# Altium PCB USB_C.PcbDoc
Units mm, origin at the board's own origin, x right, y up, seen from the top; angles counter-clockwise.
Board outline 47.3 x 26.41 mm, 2 copper layers (Top Layer, Bottom Layer); 32 components, 38 nets, 193 pads, 155 vias.
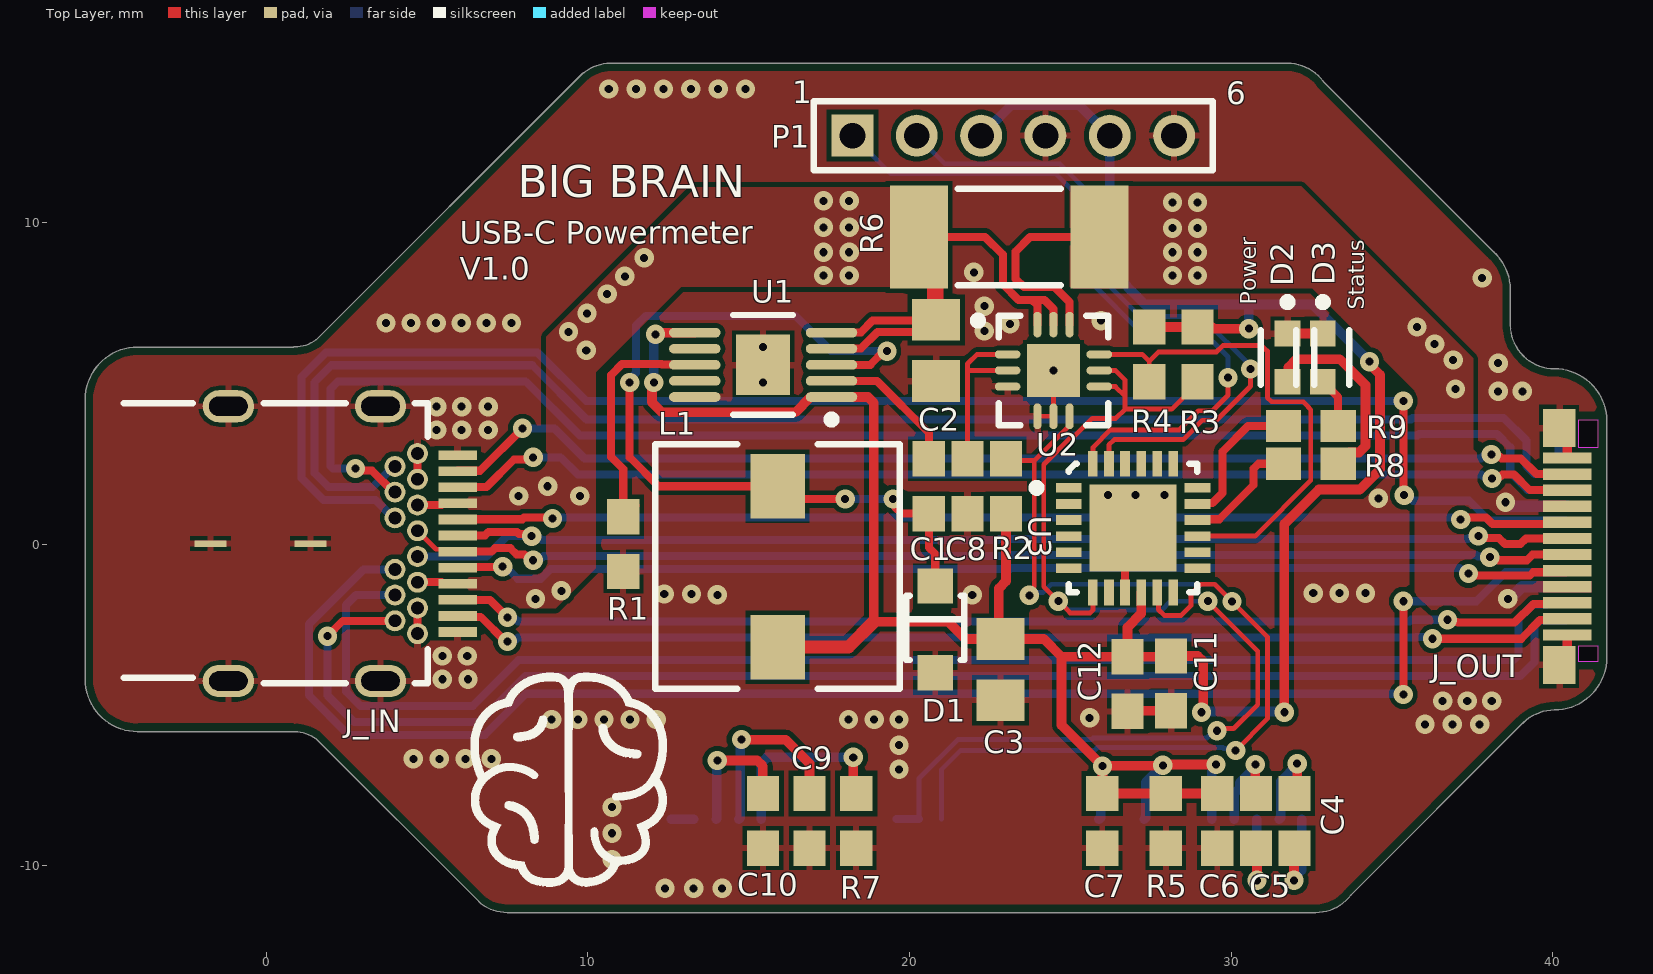
[diagram p0: Top Layer view]
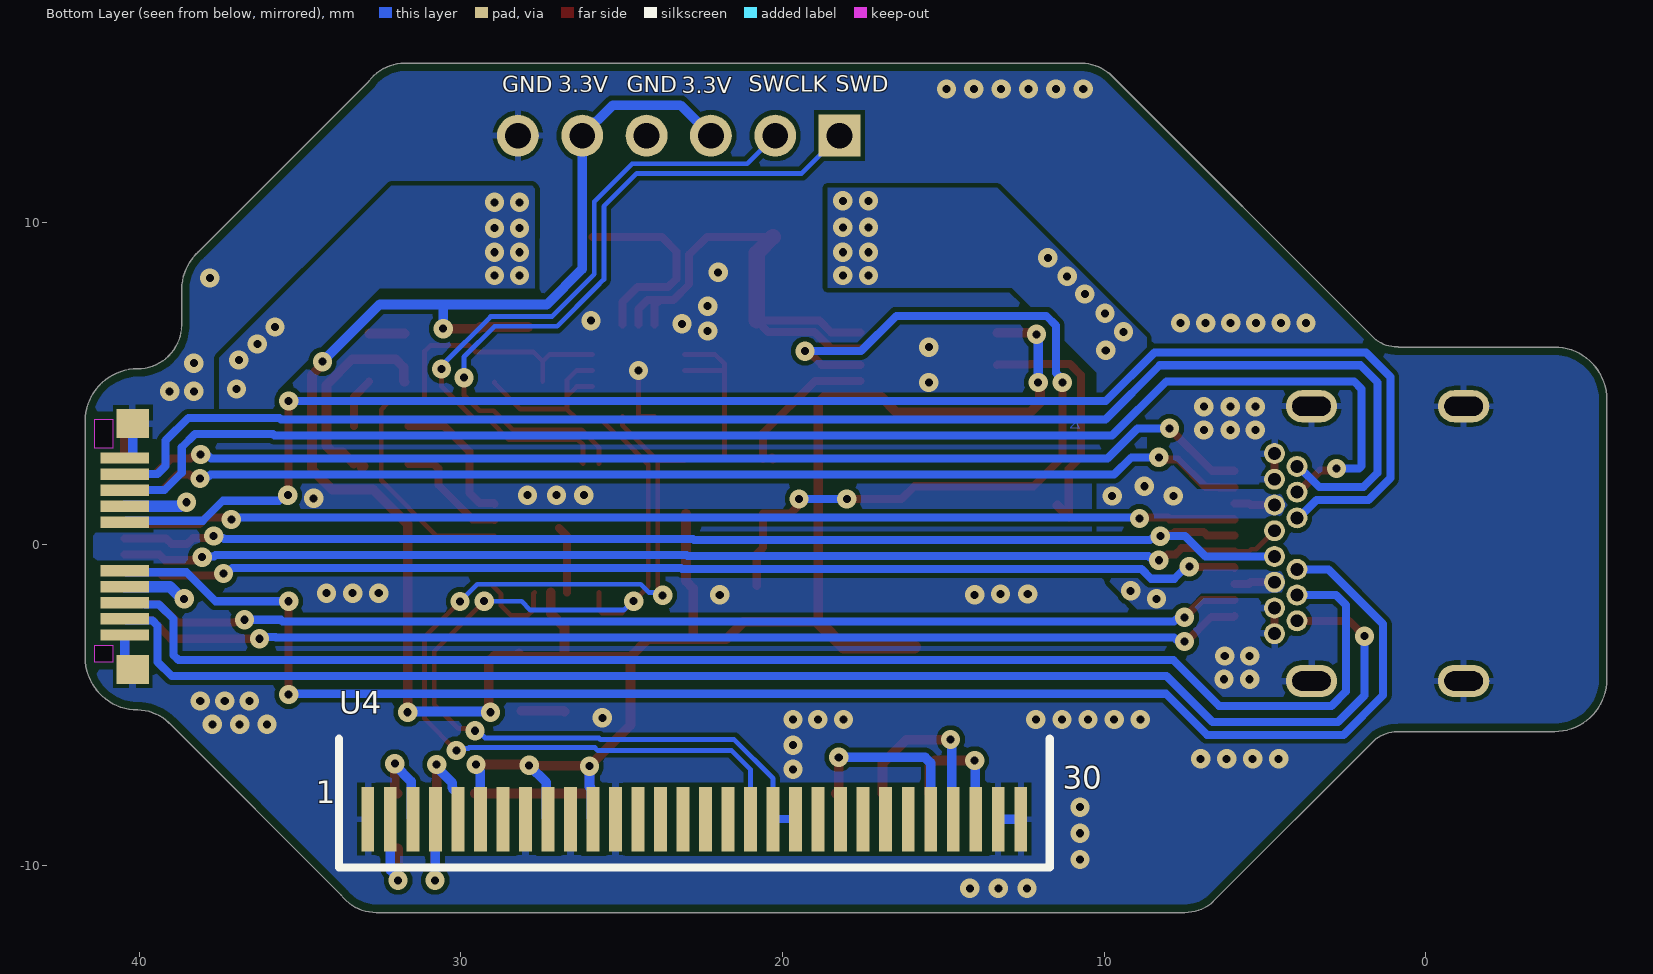
[diagram p1: Bottom Layer view, seen from below]
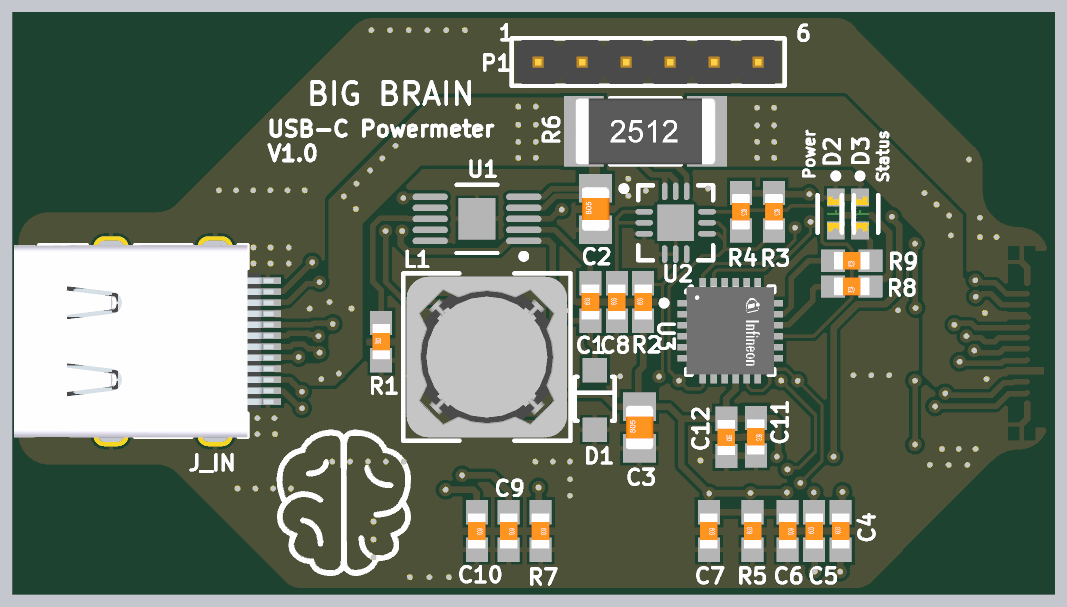
[diagram p2: 3D render of the assembled board from above, using the file's embedded part models]

## Layer stack, top to bottom
Top Solder: solder mask 0.0102, Solder Resist, Dk 3.5
Top Layer: signal copper 0.0356
Dielectric 1: dielectric 0.32, FR-4, Dk 4.8
Bottom Layer: signal copper 0.0356
Bottom Solder: solder mask 0.0102, Solder Resist, Dk 3.5

## Board outline
0.884,-5.832 cw(c0.884,-6.955) 1.55,-6.051 6.612,-11.113 ccw(c6.702,-11.023) 6.636,-11.132 ccw(c6.75,-11.075) 6.674,-11.177 ccw(c7.5,-10.075) 7.5,-11.452 ccw(c7.5,-11.325) 7.509,-11.452 ccw(c7.525,-11.325) 7.525,-11.453 32.6,-11.453 ccw(c32.6,-11.325) 32.612,-11.452 ccw(c32.625,-11.325) 32.624,-11.453 ccw(c32.624,-10.075) 33.722,-10.908 ccw(c33.638,-10.813) 33.728,-10.902 39.036,-5.583 ccw(c38.989,-5.464) 39.079,-5.554 cw(c40.05,-6.525) 40.049,-5.152 cw(c40.05,-5.496) 40.05,-5.152 ccw(c40.05,-3.525) 41.677,-3.525 41.677,3.825 ccw(c40.05,3.825) 40.05,5.452 ccw(c40.05,5.325) 40.049,5.452 cw(c40.05,6.825) 38.677,6.825 ccw(c38.67,6.825) 38.677,6.825 38.68,7.905 ccw(c38.648,7.905) 38.68,7.905 ccw(c38.553,7.905) 38.677,7.932 ccw(c37.05,7.9) 38.163,9.087 ccw(c38.076,8.995) 38.139,9.105 32.866,14.378 ccw(c32.75,14.325) 32.852,14.401 ccw(c31.75,13.575) 31.75,14.952 ccw(c31.75,14.827) 31.741,14.952 ccw(c31.725,14.826) 31.725,14.953 10.708,14.953 ccw(c10.708,14.826) 10.692,14.952 ccw(c10.725,13.575) 9.899,14.677 ccw(c9.975,14.575) 9.878,14.657 ccw(c9.915,14.535) 9.824,14.626 1.55,6.351 cw(c0.884,7.255) 0.884,6.132 ccw(c0.884,6.005) 0.849,6.127 -4,6.127 ccw(c-4,4.5) -5.627,4.5 -5.627,-4.2 ccw(c-4,-4.2) -4,-5.827 0.849,-5.827 ccw(c0.884,-5.705)

## Design rules (kind name [scope] priority, off if disabled: settings)
BoardOutlineClearance [All] p1: gap=0.25 ignorepadtopadclearanceinfootprint=FALSE except(0: Arc-SplitContinuation Track-SplitContinuation SMDPad-SplitContinuation THPad-SplitContinuation Via-SplitContinuation Fill-SplitContinuation Poly-SplitContinuation Region-SplitContinuation Text-SplitContinuation)
Clearance "Schematic Clearance Constraint" [InNet('No Net')] p1: gap=0.254 ignorepadtopadclearanceinfootprint=TRUE except(0: Arc-Hole Track-Hole SMDPad-Hole THPad-Hole Via-Hole Fill-Hole Poly-Hole Region-Hole Text-Hole; 0.127: Arc-Arc Arc-Track Track-Track; 0.6: Arc-Fill Arc-Poly Arc-Region Track-Fill Track-Poly Track-Region Fill-Fill Fill-Poly Fill-Region Poly-Poly Poly-Region Region-Region)
Clearance Clearance-xPP-xTP-xTT [All] p2: gap=0.15 ignorepadtopadclearanceinfootprint=TRUE
ComponentClearance [All] p1: gap=0.25 collisioncheckmode=3 verticalgap=0.25 showdistances=FALSE
DiffPairsRouting [All] p1: maxlimit=0.25 minlimit=0.15 mostfreqgap=0.25 toplayer_minwidth=0.15 toplayer_maxwidth=0.381 toplayer_prefwidth=0.381 bottomlayer_minwidth=0.15 bottomlayer_maxwidth=0.381 bottomlayer_prefwidth=0.381 maxuncoupledlength=12.5
Height [All] p1: minheight=0 maxheight=25 prefheight=12.5
HoleSize HoleSize-PTH [All] p1: absolutevalues=TRUE maxlimit=2 minlimit=0.25 maxpercent=80.000 minpercent=20.000
HoleToHoleClearance [All] p1: gap=0.35 allowstackedmicrovias=TRUE
MatchedLengths "Schematic Matched Net Lengths" [InNetClass('LenghtMatching')] p1: tolerance=0.01 checknetsindiffpair=FALSE checkdiffpairvsdiffpair=TRUE checkxsignals=TRUE checkothers=TRUE
MinimumAnnularRing "Minimum IAR  >0.45mm" [((ObjectKind = 'Pad') OR (ObjectKind = 'Via')) And (Layer = 'MultiLayer') And (HoleDiameter > AsMM(0.45))] p1: minimumring=0.175 // minimum inner annular ring for pads > 0.45mm finished hole size
MinimumAnnularRing "Minimum IAR <=0.45mm" [((ObjectKind = 'Pad') OR (ObjectKind = 'Via')) And (Layer = 'MultiLayer') And (HoleDiameter <= AsMM(0.45))] p2: minimumring=0.175 // minimum inner annular ring for pads <= 0.45mm finished hole size
MinimumSolderMaskSliver [All] p1: minsoldermaskwidth=0.08
PolygonConnect [InNet('GND') vs InNet('GND')] p1: thpad.connectstyle=Relief thpad.reliefconductorwidth=0.2 thpad.reliefentries=4 thpad.polygonreliefangle="90 Angle" thpad.airgapwidth=0.127 smdpad.connectstyle=Relief smdpad.reliefconductorwidth=0.2 smdpad.reliefentries=4 smdpad.polygonreliefangle="90 Angle" smdpad.airgapwidth=0.127 via.connectstyle=Direct via.reliefconductorwidth=0.2 via.reliefentries=4 via.polygonreliefangle="90 Angle" via.airgapwidth=0.127
PolygonConnect PolygonConnect-xTW [InNetClass('HV')] p2: connectstyle=Direct reliefconductorwidth=0.2 reliefentries=4 polygonreliefangle="90 Angle" airgapwidth=0.2
RoutingCorners [All] p1: cornerstyle=45-Degree minsetback=2.5 maxsetback=2.5
RoutingVias "RoutingVias <= 0.45mm" [All] p1: holewidth=0.25 width=0.6 viastyle="Through Hole" minholewidth=0.25 minwidth=0.6 maxholewidth=0.45 maxwidth=0.8 // finishet hole size <= 0.45mm
SilkToSilkClearance [All] p1: silktosilkclearance=0.2
SilkToSolderMaskClearance SilkscreenOverComponentPads [IsPad] p1: minsilkscreentomaskgap=0.2 clearancetoexposedcopper=TRUE
SolderMaskExpansion [All] p1: expansion=0 istentingtop=FALSE
UnRoutedNet [All] p1: checkbadconnections=TRUE
Width Width-xTW [All] p1: maxlimit=1.5 minlimit=0.15 preferedwidth=0.2
20 further rules are at their usual default settings.

## Classes and differential pairs
net class LenghtMatching: D1_N D1_P SSRX1_N SSRX1_P SSRX2_N SSRX2_P SSTX1_N SSTX1_P SSTX2_N SSTX2_P
net class HV: VBUS_IN VBUS_OUT
differential pair SSTX2: +SSTX2_P -SSTX2_N
differential pair SSTX1: +SSTX1_P -SSTX1_N
differential pair SSRX2: +SSRX2_P -SSRX2_N
differential pair SSRX1: +SSRX1_P -SSRX1_N
differential pair D1: +D1_P -D1_N

## Components (designator, comment, footprint, x,y, rotation, side; value= is the part's Value field where it differs from the comment)
C1 "0.47uF" _0603 20.6,1.8 r90 top
C2 "4,7u" _0805 20.825,6.025 r90 top
C3 "885012107006" _0805 22.825,-3.9 r90 top
C4 "2.2u" _0603 31.966,-8.601 r90 top
C5 "2.2u" _0603 30.766,-8.601 r90 top
C6 "0.1u" _0603 29.566,-8.601 r270 top
C7 "10u" _0603 25.991,-8.601 r270 top
C8 "22pF" _0603 21.8,1.8 r90 top
C9 "10u" _0603 16.891,-8.601 r270 top
C10 "10u" _0603 15.441,-8.601 r270 top
C11 "100n" _0603 28.125,-4.325 r270 top
C12 "100n" _0603 26.775,-4.35 r270 top
D1 "NTS260SFT1G" SOD_123 20.8,-2.6 r270 top
D2 "LT Q39G-Q1OO-25-1" FP-LT_Q39G-MFG 31.75,5.8 r270 top
D3 "LT Q39G-Q1OO-25-1" FP-LT_Q39G-MFG 32.85,5.8 r270 top
J_IN "632723100011" 632723100011 0.024,0.017 r270 top
J_OUT "632712000011" 632712000011 47.25,-0.073 r90 top
L1 "7447779112" WE-PD-M-PB 15.9,-0.7 r270 top
P1 "62000611121" 62000611121 23.225,12.7 r0 top
R1 "118k" _0603 11.1,0 r90 top
R2 "2k" _0603 23,1.8 r90 top
R3 "2k" _0603 28.95,5.9 r270 top
R4 "2k" _0603 27.45,5.9 r270 top
R5 "10k" _0603 27.966,-8.601 r90 top
R6 "20m" _2512 23.1,9.55 r0 top
R7 "390k" _0603 18.341,-8.601 r270 top
R8 "680" _0603 32.475,2.5 r180 top
R9 "680" _0603 32.475,3.675 r180 top
U1 "LT3991EMSE-3.3#TRPBF" LT-MSE-10-EDP_N 15.45,5.575 r180 top
U2 "LTC2945IUD-1#PBF" LT-UD-12_L 24.475,5.4 r0 top
U3 "XMC1100-T016F0064 AA" QFN50P400X400X90-25N 26.95,0.5 r0 top
U4 "SSD1306_OLED" SSD1306 32.891,-8.551 r180 bottom

## Footprints (in the part's own frame and the unit in brackets; to place one, negate y for a bottom-side part, rotate by r counter-clockwise, add the part's x,y. Pads: shape width x height; smd on the part's side, far side on the other; paste and mask are expansions set on the pad)
62000611121 [mm] "Pin Header, pitch 2.00 mm, THT, Vertical, single row, 6p"
  rect 1.3x1.3 hole 0.8: 1(-5,0)
  round 1.3 hole 0.8: 2(-3,0) 3(-1,0) 4(1,0) 5(3,0) 6(5,0)
  silkscreen extent -6.2,-1.07 6.2,1.07, body extent -6,-1 6,1, height 6.05
632712000011 [mm] "USB 3.1 Type C Plug Horizontal SMT"
  rect 0.35x1.5 smd: A1(2.75,6.8) A2(2.25,6.8) A3(1.75,6.8) A4(1.25,6.8) A5(0.75,6.8) A6(0.25,6.8) A7(-0.25,6.8) A8(-0.75,6.8) A9(-1.25,6.8) A10(-1.75,6.8) A11(-2.25,6.8) A12(-2.75,6.8)
  rect 0.35x1.5 smd far side: B1(-2.75,6.8) B2(-2.25,6.8) B3(-1.75,6.8) B4(-1.25,6.8) B5(-0.75,6.8) B8(0.75,6.8) B9(1.25,6.8) B10(1.75,6.8) B11(2.25,6.8) B12(2.75,6.8)
  rect 0.9x1 smd far side: Shell(-3.825,7.05) Shell(3.825,7.05)
  rect 1.18x1 smd: Shell(-3.69,7.05) Shell(3.69,7.05)
  Keep-Out Layer board cut-out: -3.58,5.85 -3.58,6.45 -3.08,6.45 -3.08,5.85
  Keep-Out Layer board cut-out: 3.075,5.85 3.075,6.45 3.945,6.45 3.945,5.85
  body extent -5.13,-5.92 5.12,7.48, height 1.74
632723100011 [mm] "USB 3.1 Type C Receptacle Horizontal THR"
  rect 0.3x1.2 smd: A1(-2.75,5.93) A2(-2.25,5.93) A3(-1.75,5.93) A4(-1.25,5.93) A5(-0.75,5.93) A6(-0.25,5.93) A7(0.25,5.93) A8(0.75,5.93) A9(1.25,5.93) A10(1.75,5.93) A11(2.25,5.93) A12(2.75,5.93)
  round 0.65 hole 0.4: B1(2.8,4.68) B2(2.4,3.98) B3(1.6,3.98) B4(1.2,4.68) B5(0.8,3.98) B6(0.4,4.68) B7(-0.4,4.68) B8(-0.8,3.98) B9(-1.2,4.68) B10(-1.6,3.98) B11(-2.4,3.98) B12(-2.8,4.68) G1(2,4.68) G2(-2,4.68)
  oval 1x1.6 hole 0.6 slot 1.2 at 90 deg: Shell(-4.27,3.53) Shell(-4.27,-1.2) Shell(4.27,3.53) Shell(4.27,-1.2)
  rect 0.2x1 smd: Shell(0,1.35) Shell(0,-1.75)
  silkscreen extent -4.37,-4.45 4.34,5, body extent -4.37,-5.6 4.37,6.19, height 3.05
_0603 [mm]
  rect 1.1x1 smd: 1(-0.85,0) 2(0.85,0)
  body extent -0.8,-0.41 0.8,0.39, height 0.3
_0805 [mm]
  rect 1.3x1.5 smd: 1(-0.95,0) 2(0.95,0)
  body extent -1,-0.64 1,0.62, height 0.78
_2512 [mm]
  rect 1.8x3.2 smd: 1(-2.8,0) 2(2.8,0)
  silkscreen extent -1.6,-1.5 1.6,1.5, body extent -3.17,-1.5 3.17,1.5, height 1.6
FP-LT_Q39G-MFG [mm]
  rect 0.8x0.8 smd paste+0 mask+0: 1(-0.75,0) 2(0.75,0)
  silkscreen extent -1.85,-0.82 0.85,0.82, body extent -1.25,-0.55 1.25,0.55, height 0.25
LT-MSE-10-EDP_N [mm] "SOP, 10-Leads, Body 3.1x3.1mm, Pitch 0.5mm, Thermal Pad 1.88x1.68mm, IPC Medium Density"
  oval 1.6x0.3 smd: 1(-2.125,1) 2(-2.125,0.5) 3(-2.125,0) 4(-2.125,-0.5) 5(-2.125,-1) 6(2.125,-1) 7(2.125,-0.5) 8(2.125,0) 9(2.125,0.5) 10(2.125,1)
  rect 1.68x1.88 smd: 11(0,0)
  silkscreen extent -2.25,-1.55 0.92,1.82, body extent -1.55,-1.55 1.55,1.55, height 1.1
LT-UD-12_L [mm] "QFN, 12-Leads, Body 3.1x3.1mm, Pitch 0.5mm, Thermal Pad 1.65x1.65mm, IPC High Density"
  oval 0.8x0.25 smd: 1(-1.425,0.5) 2(-1.425,0) 3(-1.425,-0.5) 7(1.425,-0.5) 8(1.425,0) 9(1.425,0.5)
  oval 0.25x0.8 smd: 4(-0.5,-1.425) 5(0,-1.425) 6(0.5,-1.425) 10(0.5,1.425) 11(0,1.425) 12(-0.5,1.425)
  rect 1.65x1.65 smd: 13(0,0)
  silkscreen extent -2.47,-1.7 1.7,1.7, body extent -1.55,-1.55 1.55,1.55, height 0.8
QFN50P400X400X90-25N [mm] "QFN,0.50mm pitch,square;24 pin,4.00mm L X 4.00mm W X 0.90mm H body (w/thermal tab)"
  rect 0.8x0.3 smd paste+0 mask+0: 1(-2,1.25) 2(-2,0.75) 3(-2,0.25) 4(-2,-0.25) 5(-2,-0.75) 6(-2,-1.25) 13(2,-1.25) 14(2,-0.75) 15(2,-0.25) 16(2,0.25) 17(2,0.75) 18(2,1.25)
  rect 0.3x0.8 smd paste+0 mask+0: 7(-1.25,-2) 8(-0.75,-2) 9(-0.25,-2) 10(0.25,-2) 11(0.75,-2) 12(1.25,-2) 19(1.25,2) 20(0.75,2) 21(0.25,2) 22(-0.25,2) 23(-0.75,2) 24(-1.25,2)
  rect 2.7x2.7 smd paste+0 mask+0: 25(0,0)
  silkscreen extent -3.12,-2 2,2, body extent -2,-2 2,2, height 0.91
SOD_123 [mm]
  rect 1.1x1.1 smd: 1(1.4,0) 2(-1.3,0)
  silkscreen extent -1,-0.9 1,0.9, body extent -1.09,-0.85 1.54,0.85, height 1.3
SSD1306 [mm]
  rect 0.4x2 smd: 1(0,0) 2(0.7,0) 3(1.4,0) 4(2.1,0) 5(2.8,0) 6(3.5,0) 7(4.2,0) 8(4.9,0) 9(5.6,0) 10(6.3,0) 11(7,0) 12(7.7,0) 13(8.4,0) 14(9.1,0) 15(9.8,0) 16(10.5,0) 17(11.2,0) 18(11.9,0) 19(12.6,0) 20(13.3,0) 21(14,0) 22(14.7,0) 23(15.4,0) 24(16.1,0) 25(16.8,0) 26(17.5,0) 27(18.2,0) 28(18.9,0) 29(19.6,0) 30(20.3,0)
  silkscreen extent -0.9,-1.5 21.2,2.5
WE-PD-M-PB [mm] "SMD Inductor, 2-Leads, Body 7.3 x 7.3 mm"
  rect 2x1.7 smd: 1(-2.5,0) 2(2.5,0)
  silkscreen extent -3.8,-3.8 3.8,3.8, body extent -3.65,-3.65 3.65,3.65, height 4.09

## Part data
C1 C4 C5 C6 C7 C8 C9 C10 C11 C12: library part Cap_129, ComponentLink1URL=#WERT!, mounting=SMD, Name=Cap_0603, QR=0, UID=Cap_129
C2: library part Cap_116, Capacity=1n0, Voltage=50V, ComponentLink1URL=#WERT!, mounting=SMD, Name=Cap_cer_1n0_50V, QR=0, UID=Cap_116
C3: library part Cap_111, Capacity=18p, Voltage=50V, ComponentLink1URL="javascript:Richfaces.showModalPanel('quickViewModalPanel', %7burl:'/web/p/products/723-6228',viewMode:'quickView'%7d);", mounting=SMD, Name=Cap_cer_18p_50V, Name_Hyperlink="Keramikkondensator SMT 18 pF 50 VDC", QR=0, RS_number=723-6228, UID=Cap_111
D1: library part DIODE_4, Current / Power="1.1 A", ComponentLink1URL=http://at.rs-online.com/web/search/searchBrowseAction.html?method=getProduct&R=2540702, mounting=THT, Name=11DQ06, Name_Hyperlink="Schottky-Diode 11DQ06", QR=1, RS_number=254-0702, Type=Schottky, UID=DIODE_4
D2 D3: library part CMP-62016-000026-1, "LED GREEN DIFFUSED 0603 SMD", Case/Package=SMD/SMT, Color=Green, Forward Current=15mA, Forward Voltage=3.2V, Max Operating Temperature=85°C, Min Operating Temperature=-40°C, Reverse Voltage=5V, Test Current=5mA, Depth=0.9mm, Dominant Wavelength=530nm, Length=1.7mm, Lens Style=Diffused, Luminous Flux=0.55lm, Luminous Intensity=280mcd, Mount="Surface Mount", Number of Elements=1, Number of LEDs=1, Number of Pins=2, Packaging="Tape and Reel", Radiation Hardening=No
J_IN: library part CMP-1502-03213-1, "USB 3.1 Type C Receptacle WR-COM, Horizontal, SMT / THT", Contact Resistance=30mOhm, Manufacturer="Wurth Elektronik", Operating Temperature=-40to105degC, Rated Current=5A, Working Voltage=20VDC, Connector Type=USB3.1TypeC, Datasheet URL=https://katalog.we-online.de/em/datasheet/632723x00011%282%29.pdf, Gender=Receptacle, Manufacturer URL=http://www.we-online.de, Mounting Technology=SMT/THT, Orientation=Horizontal, Package Reference=632723100011, Packaging=TapeandReel, Part Number=632723100011, Publisher=WurthElektronik
J_OUT: library part CMP-1502-03215-1, "USB 3.1 Type C Plug WR-COM, Horizontal, SMT", Contact Resistance=30mOhm, Manufacturer="Wurth Elektronik", Operating Temperature=-25to105degC, Rated Current=5A, Working Voltage=20VDC, Connector Type=USB3.1TypeC, Datasheet URL=https://katalog.we-online.de/em/datasheet/632712000011.pdf, Gender=Plug, Manufacturer URL=http://www.we-online.de, Mounting Technology=SMT, Orientation=Horizontal, Package Reference=632712000011, Packaging=TapeandReel, Part Number=632712000011, Publisher=WurthElektronik
L1: library part CMP-0227-00301-1, "SMD-Shielded Power Inductor WE-PD, L = 12.0 µH", Inductance="12.0 ÂµH", ComponentLink1Description="Manufacturer Link", ComponentLink1URL=http://www.we-online.com, ComponentLink2Description=Datasheet, ComponentLink2URL=http://www.we-online.de/katalog/media/pdf/7447779112.pdf, DatasheetVersion="ver 10, Jan-2008", PackageDescription="SMD Inductor, 2-Leads, Body 7.3 x 7.3 mm", PackageReference=WE-PD-M-PB, PackageVersion=2008
P1: library part CMP-1502-00960-1, "THT Vertical Pin Header WR-PHD, Pitch 2.00 mm, Single Row, 6 pins", Contact Resistance=20mOhm, Manufacturer="Wurth Elektronik", Operating Temperature=-40to105degC, Rated Current=2A, Withstanding Voltage=500VAC, Working Voltage=200VAC, Datasheet URL=https://katalog.we-online.de/em/datasheet/62000611121.pdf, Gender=Male, Manufacturer URL=http://www.we-online.de, Mounting Technology=THT, Orientation=Vertical, Package Reference=62000611121, Packaging=Bag, Part Number=62000611121, Pin Number=6, Pitch=2.00mm, Publisher=WurthElektronik, Row Number=Single
R1 R2 R3 R4 R5 R7 R8 R9: library part Res_5, ComponentLink1URL=#WERT!, mounting=SMD, Name=Res_0603, UID=Res_5
R6: library part Res_11, ComponentLink1URL=#WERT!, mounting=SMD, Name=Res_2512, UID=Res_11
U1: library part CMP-0491-01057-1, "1.2 A Step-Down Regulator with 2.8 uA Quiescent Current, 10-pin SOP (MSE-10-EDP), -40 to 125 degC, Pb-Free, Tape and Reel", Frequency Adjust Range="200kHz - 2MHz", Manufacturer="Linear Technology", ComponentLink1Description="Manufacturer URL", ComponentLink1URL=http://www.linear.com/, ComponentLink2Description=Datasheet, ComponentLink2URL=http://cds.linear.com/docs/en/datasheet/3991fa.pdf, ComponentLink3Description="Package Specification", ComponentLink3URL=http://cds.linear.com/docs/en/packaging/05081664_I_MSE.pdf, DatasheetVersion="Rev. A", Mounting Technology="Surface Mount", Number of Outputs=1, PackageDescription="10-Pin Plastic MSOP, Exposed Die Pad, Body 3 x 3 mm, Pitch 0.5 mm", PackageReference=MSE-10, PackageVersion="Rev. I, 05/2013", Packing="Tape and Reel", PartNumber=LT3991EMSE-3.3#TRPBF, RoHS=TRUE
U2: library part CMP-0482-01542-1, "Wide Range I2C Power Monitor, 12-pin QFN (UD-12), -40 to 85 degC, Pb-Free", Manufacturer="Linear Technology", Code_JEDEC=MO-220, ComponentLink1Description="Manufacturer URL", ComponentLink1URL=http://www.linear.com/, ComponentLink2Description=Datasheet, ComponentLink2URL=http://cds.linear.com/docs/en/datasheet/2945f.pdf, ComponentLink3Description="Package Specification", ComponentLink3URL=http://cds.linear.com/docs/en/packaging/QFN_12_%2005-08-1855.pdf, Mounting Technology="Surface Mount", Number of Supplies(#)=1, PackageDescription="12-Pin Plastic QFN, Body 3 x 3 mm, Pitch 0.5 mm", PackageReference=UD-12, PackageVersion="Rev. Ã˜, 06/2010", PartNumber=LTC2945IUD-1#PBF, RoHS=TRUE
U3: library part "XMC1100-Q024F0064 AA", "32-bit XMC1000 Industrial Microcontrollers ARM® Cortex™-M0 / PG-VQFN-24-19", I/O Operation Voltages="3.3 V, 5.0 V", Manufacturer=Infineon, Max Clock Frequency="32 MHz", On-chip Voltage Regulator=TRUE, PartNumber="XMC1100-Q024F 0064 AA", Power Modes="clock gating possible", Temperature range="-40 to 85°C", A / D input lines=8, CAN Nodes=0, Comment/Add. Features="Temp. Sensor", ComponentLink2Description=Datasheet, ComponentLink2URL=http://www.infineon.com/dgdl/xmc1100_ds_v1.4_2014_05.pdf?folderId=db3a30433580b3710135a47f3eb76c98&fileId=db3a30433d1d0bbe013d256b60160b7f&ack=t, ComponentLink3Description="Package Specification", ComponentLink3URL=http://www.infineon.com/cms/en/product/microcontroller/32-bit-industrial-microcontroller-based-on-arm-registered-cortex-tm-m/32-bit-xmc1000-industrial-microcontroller-arm-registered-cortex-tm-m0/channel.html?channel=db3a30433c1a8752013c1aa35a6a0029&tab=2, DatasheetVersion="Rev. 1.4", Digital I/O Lines=22, DMA Channels=0, DSP functionality (e.g MDU/MAC)=FALSE, E2PROM Emulation (Data-Flash)=TRUE, External Bus interface=FALSE, FlexRay<sup>TM</sup>=FALSE, Floating Point Unit=FALSE, Green=TRUE, Halogen-free=TRUE, Instruction set architecture="ARM Cortex-M0", Instruction width [bits]=32/16, LIN BSL loader (for fast Flash programming)=FALSE, Mounting Technology="Surface Mount", Number of ADC Modules=1, On-chip clock generation=TRUE, Oscillator Watchdog=TRUE, PackageDescription="24-Pin Plastic (Green) Plastic (Green) Very Thin Profile Quad Flat Non Leaded Package, Body 4.0 x 4.0 mm, Pitch 0.5 mm", PackageReference=PG-VQFN-24-13, PackageVersion="V1.4, 05/2014", Peripheral Control Processor (PCP)=FALSE, Program Memory="64.0 KByte", Real Time Clock (RTC)=TRUE, Serial I/O Interfaces=2, SRAM (incl. Cache)="64.0 KByte", Timed I/O Pins (PWM-Ch,CAPCOM)=22, Timer / Counter=4, Touch / LED Matrix control=FALSE, Type of Memory=Flash, Type of Serial I/O Interfaces="SPI(2), Dual SPI, Quad SPI, UART, I2C, I2S", Watchdog Timer=TRUE

## Via types
v1: diameter 0.6, hole 0.25, Top Layer to Bottom Layer, tented both sides, 154 vias
v2: diameter 0.6/0.6 (per signal layer), hole 0.25, Top Layer to Bottom Layer, tented both sides, 1 vias

## Nets (pads, with @x,y where several pads share a name; then routed paths per layer and width w, separated by ;. In a path a pad name is that pad's centre, name@x,y a point inside that pad or via, vN(x,y) a via of type N, cw(c..) or ccw(c..) an arc to the next point about the centre after c; other vN are vias at no path point)
+3.3V: C3.2 C6.1 C7.1 C11.1 C12.1 L1.2 P1.3 P1.5 R2.1 R3.1 R4.1 R5.2 U1.1 U1.6 U3.10 U4.6 U4.9 U4.11 | length 93.8
  Top Layer w0.3: v1(12.05,5.025) 11.993,4.968 11.993,4.407 12.3,4.1 16.45,4.1 16.925,4.575 U1.1 18.709,4.575 18.885,4.399 18.885,-2.415 21.209,-2.415 21.744,-2.95 C3.2 ; v1(12.1,6.525) 12.15,6.575 U1.6 ; R2.1 23,-1.15 22.775,-1.375 22.775,-2.9 C3.2 ; U3.10 27.2,-2.162 26.775,-2.587 C12.1 ; v1@27.818,-6.818 v1(27.875,-6.875) 27.863,-6.887 26.013,-6.887 v1(26,-6.9) ; R4.1@27.9,6.75 29.4,6.75 29.45,6.7 v1(30.55,6.7) ; v1@27.931,-6.85 v1(29.525,-6.85) ; C11.1@28.1,-3.5 C12.1 ; C11.1@28.2,-3.4 C11.1 28.957,-3.475 29.132,-3.651 29.132,-5.168 v1(29.075,-5.225) ; C6.1 R5.2 C7.1 26,-7.742 v1(26,-6.9) ; v1(31.65,-5.225) 31.65,0.626 32.724,1.7 33.999,1.7 34.625,2.326 34.625,5.267 34.299,5.593 v1(34.299,5.674) ; C3.2 24.175,-2.95 24.725,-3.5 24.788,-3.5 ; 24.788,-3.5 C12.1 ; 24.788,-3.5 24.725,-3.562 24.725,-5.625 v1(26,-6.9)
  Top Layer w0.4: L1.2 18.1,-3.2 18.885,-2.415
  Bottom Layer w0.3: v1(12.05,5.025) 12.05,6.475 v1(12.1,6.525) ; P1.3 23.175,13.65 25.275,13.65 P1.5 26.225,8.55 27.325,7.45 30.55,7.45 ; U4.11 25.941,-8.501 25.941,-7.601 26,-7.542 v1(26,-6.9) v1@26.057,-6.843 ; U4.9 27.341,-8.501 27.341,-7.409 v1(27.875,-6.875) ; v1(29.075,-5.225) 29.1,-5.2 31.625,-5.2 v1(31.65,-5.225) ; U4.6 v1@29.391,-7.065 ; v1(30.55,6.7) 30.55,7.45 ; v1(34.299,5.674) 32.523,7.45 30.55,7.45
ALERT: R4.2 U2.9 U3.15 | length 15.6
  Top Layer w0.15: U2.9 27.231,5.9 27.45,5.681 ; R4.2 27.45,5.681 ; U3.15 30.743,0.25 32.475,1.982 32.475,4.175 32.4,4.25 32.4,4.268 32.243,4.425 31.257,4.425 31.125,4.557 31.125,6 30.95,6.175 29.743,6.175 29.543,5.975 27.744,5.975 27.45,5.681
CC1: J_IN.A5 J_OUT.A5 | length 34.7
  Top Layer w0.25: J_IN.A5 5.961,0.775 7.963,0.775 8.014,0.825 8.875,0.825 v1(8.9,0.8) ; v1(37.134,0.766) 37.197,0.828 37.92,0.828 38.121,0.627 40.4,0.627 J_OUT.A5
  Bottom Layer w0.25: v1(8.9,0.8) 8.928,0.828 37.072,0.828 v1(37.134,0.766)
CC2: J_IN.B5 J_OUT.B5 | length 49.1
  Top Layer w0.25: v1(35.35,-4.675) v1(35.35,-1.775)
  Bottom Layer w0.25: J_IN.B5 3.027,-0.783 1.329,-2.481 1.329,-4.696 2.56,-5.928 6.795,-5.928 8.073,-4.65 35.325,-4.65 v1(35.35,-4.675) ; v1(35.35,-1.775) 37.625,-1.775 38.527,-0.873 40.4,-0.873 J_OUT.B5
D1_N: J_IN.A7 J_IN.B7 J_OUT.A7 | length 36.4
  Top Layer w0.15: J_IN.B7 5.279,-0.158 5.429,-0.158 5.504,-0.233 J_IN.A7
  Top Layer w0.25: J_IN.A7 7.004,-0.233 7.112,-0.125 7.588,-0.125 7.788,-0.325 8.03,-0.325 8.205,-0.5 v1(8.3,-0.5) ; v1(38.041,-0.405) 38.108,-0.472 38.277,-0.472 38.305,-0.5 39.195,-0.5 39.373,-0.323 J_OUT.A7
  Bottom Layer w0.25: v1(8.3,-0.5) 8.367,-0.433 8.563,-0.433 8.621,-0.375 22.951,-0.375 22.988,-0.338 37.621,-0.338 37.666,-0.383 38.019,-0.383 v1(38.041,-0.405)
D1_P: J_IN.A6 J_IN.B6 J_OUT.A6 | length 38.7
  Top Layer w0.25: J_IN.A6 6.797,0.267 6.905,0.375 7.795,0.375 7.859,0.312 8.19,0.312 v1(8.252,0.25) ; v1(37.682,0.253) 37.749,0.186 38.325,0.186 38.512,0 38.988,0 39.166,0.177 J_OUT.A6
  Bottom Layer w0.25: J_IN.B6 6.854,-0.383 7.487,0.25 v1(8.252,0.25) 8.319,0.183 8.515,0.183 8.573,0.125 22.744,0.125 22.781,0.162 37.361,0.162 37.385,0.186 37.615,0.186 v1(37.682,0.253)
GND: C2.1 C3.1 C6.2 C7.2 C8.1 C9.2 C10.2 C11.2 C12.2 D1.1 D2.1 D3.1 J_IN.A1 J_IN.A12 J_IN.B1 J_IN.B12 J_IN.G1 J_IN.G2 J_IN.Shell J_OUT.A1 J_OUT.A12 J_OUT.B1 J_OUT.B12 J_OUT.Shell P1.4 P1.6 R1.1 R5.1 R7.2 U1.10 U1.11 U2.3 U2.4 U2.5 U2.13 U3.9 U3.25 U4.1 U4.8 U4.10 U4.12 U4.29 U4.30 | length 13.4
  Top Layer w0.15: U2.4 U2.5 v1(24.475,5.4)
  Top Layer w0.25: J_IN.B1 J_IN.G1 ; J_IN.G2 J_IN.B12 ; U3.9 26.7,0.25 U3.25
  Top Layer w0.3: C12.2 26.8,-5.175 C11.2 ; D2.1 D3.1 ; J_OUT.Shell@40.2,-3.763 40.45,-3.513 J_OUT.A12 ; J_OUT.Shell@40.2,3.617 40.45,3.367 J_OUT.A1
  Bottom Layer w0.3: U4.30 U4.29 ; J_OUT.Shell@40.2,-3.898 40.45,-3.648 J_OUT.B1 ; J_OUT.Shell@40.2,3.752 40.2,2.702 40.225,2.677 J_OUT.B12
  other v1: 12.4,-10.7 13.287,-10.7 14.175,-10.7 10.75,-9.8 10.75,-8.988 10.75,-8.175 19.675,-7 4.575,-6.675 5.383,-6.675 6.192,-6.675 7,-6.675 19.675,-6.25 36.025,-5.6 36.875,-5.6 37.725,-5.6 8.875,-5.45 9.687,-5.45 10.5,-5.45 11.312,-5.45 12.125,-5.45 18.1,-5.45 18.9,-5.45 19.675,-5.45 25.6,-5.4 36.575,-4.875 37.337,-4.875 38.1,-4.875 5.475,-4.2 6.275,-4.2 5.475,-3.475 6.25,-3.475 14.025,-1.575 21.95,-1.575 12.375,-1.55 13.225,-1.55 32.55,-1.525 33.362,-1.525 34.175,-1.525 34.575,1.425 26.175,1.525 27.025,1.525 27.925,1.525 5.3,3.55 6.075,3.55 6.9,3.55 5.3,4.275 6.075,4.275 6.9,4.275 38.3,4.75 39.05,4.75 15.45,5.025 38.3,5.625 15.45,6.125 22.325,6.625 23.125,6.85 3.725,6.875 4.505,6.875 5.285,6.875 6.065,6.875 6.845,6.875 7.625,6.875 25.95,6.95 22.325,7.4 22,8.45 10.65,14.15 11.5,14.15 12.35,14.15 13.2,14.15 14.05,14.15 14.9,14.15
  other v2: 37.8,8.275
NetC1_1: C1.1 D1.2 L1.1 U1.3 | length 26.9
  Top Layer w0.25: v1(11.3,5.025) 11.3,2.7 12.2,1.8 L1.1 16.297,1.403 v1(18,1.403) ; U1.3 18.78,5.575 19.205,6 v1(19.3,6) ; v1(19.485,1.403) 19.552,1.336 19.552,1.158 19.76,0.95 C1.1 20.6,-0.1 20.8,-0.3 D1.2
  Bottom Layer w0.25: v1(11.3,5.025) 11.3,5.12 11.5,5.32 11.5,6.8 11.8,7.1 16.459,7.1 17.559,6 v1(19.3,6) ; v1(18,1.403) v1(19.485,1.403)
NetC1_2: C1.2 U1.2 | length 4.5
  Top Layer w0.25: U1.2 18.986,5.075 20.6,3.461 C1.2
  Top Layer w0.3: C1.2@20.3,2.65 C1.2@20.325,2.675
NetC4_1: C4.1 U4.2 | length 3
  Top Layer w0.3: v1(31.95,-10.45) 31.95,-9.467 C4.1
  Bottom Layer w0.3: v1(31.95,-10.45) 31.95,-10.369 32.191,-10.127 U4.2
NetC4_2: C4.2 U4.3 | length 2.9
  Top Layer w0.3: C4.2 32.05,-7.667 v1(32.05,-6.825)
  Bottom Layer w0.3: U4.3 31.541,-8.501 31.541,-7.377 32.05,-6.868 v1(32.05,-6.825)
NetC5_1: C5.1 U4.4 | length 2.9
  Top Layer w0.3: C5.1 30.8,-9.485 v1(30.8,-10.45)
  Bottom Layer w0.3: U4.4 30.796,-8.555 30.796,-10.446 v1(30.8,-10.45)
NetC5_2: C5.2 U4.5 | length 2.9
  Top Layer w0.3: v1(30.75,-6.85) 30.75,-7.735 C5.2
  Bottom Layer w0.3: U4.5 30.091,-7.751 30.268,-7.574 30.268,-7.413 30.75,-6.931 v1(30.75,-6.85)
NetC8_2: C8.2 U2.1 U2.2 | length 5.6
  Top Layer w0.15: C8.2 21.8,5.4 ; U2.2 21.8,5.4 ; U2.1 22.1,5.9 21.8,5.6 21.8,5.4
NetC9_1: C9.1 U4.27 | length 5.9
  Top Layer w0.3: v1(14.775,-6.075) 16.15,-6.075 16.891,-6.816 C9.1
  Bottom Layer w0.3: U4.27 14.733,-8.509 14.733,-6.117 v1(14.775,-6.075)
NetC10_1: C10.1 U4.28 | length 4.2
  Top Layer w0.3: v1(14.025,-6.725) 15.266,-6.725 15.441,-6.901 C10.1
  Bottom Layer w0.3: U4.28 14.008,-8.534 14.008,-6.742 v1(14.025,-6.725)
NetD2_2: D2.2 R8.1 | length 6.4
  Top Layer w0.3: D2.2 31.775,5.075 31.775,5.5 32.025,5.75 33.374,5.75 34.175,4.949 34.175,3.051 33.974,2.85 33.675,2.85 R8.1 ; R8.1@33.075,2.375 33.025,2.425 R8.1@33.075,2.475
NetD3_2: D3.2 R9.1 | length 1.6
  Top Layer w0.25: D3.2 33.325,4.575 R9.1
NetR1_2: R1.2 U1.8 | length 7.8
  Top Layer w0.25: R1.2 11.1,2.334 10.725,2.709 10.725,5.263 11.062,5.6 12.288,5.6 12.304,5.585 13.315,5.585 U1.8
  Top Layer w0.3: R1.2 R1.2@11.45,1.2
NetR7_1: R7.1 U4.26 | length 5.8
  Top Layer w0.3: v1(18.25,-6.625) 18.25,-7.66 R7.1
  Bottom Layer w0.3: U4.26 15.391,-6.801 15.567,-6.625 v1(18.25,-6.625)
SBU1: J_IN.A8 J_OUT.A8 | length 35
  Top Layer w0.25: J_IN.A8 5.97,-0.716 7.334,-0.716 v1(7.35,-0.7) ; v1(37.375,-0.913) 37.47,-0.913 37.537,-0.98 39.281,-0.98 39.388,-0.873 40.4,-0.873 J_OUT.A8
  Bottom Layer w0.25: v1(7.35,-0.7) 7.445,-0.7 7.82,-1.075 8.538,-1.075 8.838,-0.775 23.117,-0.775 23.154,-0.738 37.105,-0.738 37.28,-0.913 v1(37.375,-0.913)
SBU2: J_IN.B8 J_OUT.B8 | length 50.1
  Top Layer w0.25: v1(35.35,4.45) 35.362,4.437 35.362,1.537 v1(35.375,1.525)
  Bottom Layer w0.25: J_IN.B8 3.955,0.817 3.398,1.375 1.777,1.375 1.1,2.052 1.1,5.198 1.865,5.962 8.438,5.962 9.95,4.45 v1(35.35,4.45) ; v1(35.375,1.525) 35.47,1.525 35.645,1.35 37.399,1.35 38.021,0.727 40.4,0.727 J_OUT.B8
SCL: R2.2 U2.6 U3.11 U4.18 | length 34.2
  Top Layer w0.15: R2.2 23.05,2.6 23.875,2.6 ; v1(23.725,-1.59) 23.875,-1.59 23.811,-1.526 23.811,-1.382 23.875,-1.318 23.875,0.457 23.875,2.6 ; v1@23.86,-1.748 v1@23.86,-1.605 ; U2.6 24.975,3.7 23.875,2.6 ; U3.11 27.737,-1.536 27.737,-2.032 27.92,-2.215 28.443,-2.215 28.748,-1.91 28.748,-1.555 29.055,-1.248 29.49,-1.248 v1(30.023,-1.78) 31.125,-2.883 31.125,-5.43 v1(30.137,-6.417)
  Bottom Layer w0.15: U4.18 20.991,-7.009 21.583,-6.417 25.74,-6.417 25.833,-6.325 29.742,-6.325 29.765,-6.347 30.068,-6.347 v1(30.137,-6.417) ; v1(23.725,-1.59) 23.846,-1.59 23.936,-1.5 24.158,-1.5 24.41,-1.248 29.49,-1.248 v1(30.023,-1.78)
SDA: R3.2 U2.7 U2.8 U3.7 U4.19 U4.20 | length 37.1
  Top Layer w0.15: U3.7 25.7,-2.051 25.612,-2.138 24.993,-2.138 24.175,-1.32 24.175,2.476 25.049,3.35 25.12,3.35 25.679,3.909 26.409,3.909 26.7,4.2 ; U2.7 26.4,4.9 26.7,4.6 ; U2.8 26.4,5.4 26.7,5.1 26.7,4.6 ; R3.2 28.95,5 28.15,4.2 26.7,4.2 ; v1(29.273,-1.773) 30.825,-3.325 30.825,-4.987 30.082,-5.731 29.626,-5.731 v1(29.557,-5.8) ; 26.7,4.2 26.7,4.6
  Bottom Layer w0.15: U4.19 20.291,-7.284 21.501,-6.075 25.658,-6.075 25.708,-6.025 29.244,-6.025 29.469,-5.8 v1(29.557,-5.8) ; v1(24.627,-1.773) 24.663,-1.773 24.94,-2.05 27.834,-2.05 28.111,-1.773 v1(29.273,-1.773)
  Bottom Layer w0.25: U4.20 U4.19
SSRX1_N: J_IN.B10 J_OUT.B10 | length 45.2
  Top Layer w0.25: v1(2.775,2.35) 2.842,2.283 3.29,2.283 3.955,1.617 J_IN.B10
  Bottom Layer w0.25: v1(2.775,2.35) 2.075,2.35 2,2.425 2,4.825 2.237,5.062 8.065,5.062 9.752,3.375 35.795,3.375 35.844,3.423 38.265,3.423 38.675,3.013 38.675,2.22 39.218,1.677 J_OUT.B10
SSRX1_P: J_IN.B11 J_OUT.B11 | length 46.8
  Bottom Layer w0.25: J_IN.B11 3.955,2.417 3.313,1.775 1.943,1.775 1.5,2.218 1.5,5.032 2.03,5.562 8.272,5.562 9.959,3.875 35.588,3.875 35.637,3.923 38.472,3.923 39.175,3.22 39.175,2.427 39.425,2.177 J_OUT.B11
SSRX2_N: J_IN.A10 J_OUT.A10 | length 35.1
  Top Layer w0.25: J_IN.A10 6.958,-1.733 v1(7.5,-2.275) ; v1(36.724,-2.35) 36.791,-2.417 37.022,-2.417 37.045,-2.44 38.812,-2.44 39.395,-1.857 39.825,-1.857 39.859,-1.823 J_OUT.A10
  Bottom Layer w0.25: v1(7.5,-2.275) 7.567,-2.342 7.763,-2.342 7.821,-2.4 35.538,-2.4 35.588,-2.35 v1(36.724,-2.35)
SSRX2_P: J_IN.A11 J_OUT.A11 | length 35.2
  Top Layer w0.25: J_IN.A11 5.979,-2.258 6.669,-2.258 7.437,-3.025 v1(7.5,-3.025) ; v1(36.26,-2.94) 39.019,-2.94 39.602,-2.357 40.416,-2.357 J_OUT.A11
  Bottom Layer w0.25: v1(7.5,-3.025) 7.567,-2.958 7.763,-2.958 7.821,-2.9 35.745,-2.9 35.756,-2.89 36.21,-2.89 v1(36.26,-2.94)
SSTX1_N: J_IN.A3 J_OUT.A3 | length 35.4
  Top Layer w0.25: J_IN.A3 6.415,1.767 6.429,1.782 6.854,1.782 7.71,2.638 8.238,2.638 v1(8.3,2.7) ; v1(38.106,2.04) 38.173,2.107 38.37,2.107 38.427,2.165 38.794,2.165 39.282,1.677 J_OUT.A3
  Bottom Layer w0.25: v1(8.3,2.7) 9.154,2.7 9.689,2.165 37.785,2.165 37.842,2.107 38.039,2.107 v1(38.106,2.04)
SSTX1_P: J_IN.A2 J_OUT.A2 | length 35.7
  Top Layer w0.25: J_IN.A2 5.968,2.282 6.647,2.282 v1(7.965,3.6) ; v1(38.085,2.79) 38.152,2.723 38.348,2.723 38.406,2.665 39.001,2.665 39.489,2.177 J_OUT.A2
  Bottom Layer w0.25: v1(7.965,3.6) 8.961,3.6 9.896,2.665 37.763,2.665 37.821,2.723 38.018,2.723 v1(38.085,2.79)
SSTX2_N: J_IN.B3 J_OUT.B3 | length 44.5
  Bottom Layer w0.25: J_IN.B3 2.792,-1.583 2.479,-1.896 2.479,-4.574 2.933,-5.028 6.423,-5.028 7.85,-3.6 38.779,-3.6 38.925,-3.454 38.925,-2.327 39.379,-1.873 39.825,-1.873 39.875,-1.823 J_OUT.B3
SSTX2_P: J_IN.B2 J_OUT.B2 | length 45
  Top Layer w0.25: v1(1.904,-2.861) 2.382,-2.383 J_IN.B2
  Bottom Layer w0.25: v1(1.904,-2.861) 1.904,-4.706 2.726,-5.528 6.63,-5.528 8.057,-4.1 38.986,-4.1 39.425,-3.661 39.425,-2.534 39.586,-2.373 40.4,-2.373 J_OUT.B2
Status_LED1: R8.2 U3.16 | length 3.7
  Top Layer w0.25: U3.16 28.975,0.775 29.629,0.775 30.7,1.846 30.7,2.354 30.846,2.5 R8.2
Status_LED2: R9.2 U3.17 | length 4.4
  Top Layer w0.25: U3.17 28.975,1.275 29.414,1.275 29.725,1.586 29.725,2.875 30.525,3.675 R9.2
SWCLK: P1.2 U3.23 | length 21.1
  Top Layer w0.15: U3.23@26.275,2.575 U3.23 26.2,3.086 26.365,3.251 28.507,3.251 29.106,3.85 29.542,3.85 30.6,4.908 v1(30.6,5.444)
  Bottom Layer w0.15: P1.2 21.1,11.825 24.675,11.825 25.85,10.65 25.85,8.395 27.17,7.075 29.074,7.075 30.6,5.549 v1(30.6,5.444)
SWD: P1.1 U3.24 | length 22.4
  Top Layer w0.15: U3.24 25.705,2.505 25.705,3.015 26.241,3.551 28.383,3.551 28.982,4.15 29.418,4.15 29.9,4.632 v1(29.9,5.175)
  Bottom Layer w0.15: P1.1 19.4,11.525 24.525,11.525 25.55,10.5 25.55,8.232 25.812,7.97 27.007,6.775 28.95,6.775 29.9,5.825 v1(29.9,5.175)
VBUS_IN: C2.2 J_IN.A4 J_IN.A9 J_IN.B4 J_IN.B9 R6.1 U1.4 U1.5 U2.11 U2.12 | length 19.3
  Top Layer w0.25: J_IN.B4 5.454,-1.183 5.504,-1.233 J_IN.A9 ; J_IN.B9 5.454,1.217 5.504,1.267 J_IN.A4 ; U1.4 17.585,6.085 18.485,6.085 19,6.6 20.45,6.6 20.8,6.95 18.85,6.95 18.485,6.585 17.585,6.585 U1.5 ; R6.1 22.35,9.55 22.9,9 22.9,8.081 23.39,7.59 23.81,7.59 ; U2.12 23.975,7.425 23.81,7.59 ; U2.11 24.475,7.315 24.2,7.59 23.81,7.59
  Top Layer w0.5: R6.1 20.8,9.05 C2.2@20.8,6.95
  other v1: 8.375,-1.7 9.175,-1.45 7.85,1.5 9.75,1.5 8.75,1.8 9.95,6.025 9.4,6.6 9.975,7.175 10.6,7.775 11.15,8.325 17.325,8.35 18.125,8.35 11.75,8.9 17.325,9.075 18.125,9.075 17.325,9.85 18.125,9.85 17.325,10.675 18.125,10.675
VBUS_OUT: J_OUT.A4 J_OUT.A9 J_OUT.B4 J_OUT.B9 R6.2 U2.10 | length 10.3
  Top Layer w0.25: U2.10 24.975,7.525 24.51,7.99 23.556,7.99 23.3,8.246 23.3,9.1 23.75,9.55 R6.2
  Bottom Layer w0.35: v1(38.525,1.302) 38.593,1.302 38.718,1.177 J_OUT.B9 ; v1(38.6,-1.7) 38.668,-1.7 39.045,-1.323 J_OUT.B4
  other v1: 36.975,4.825 36.9,5.725 36.325,6.225 35.775,6.75 28.175,8.35 28.95,8.35 28.175,9.075 28.95,9.075 28.175,9.825 28.95,9.825 28.175,10.625 28.95,10.625
pads on no net: U1.7 U1.9 U3.1 U3.2 U3.3 U3.4 U3.5 U3.6 U3.8 U3.12 U3.13 U3.14 U3.18 U3.19 U3.20 U3.21 U3.22 U4.7 U4.13 U4.14 U4.15 U4.16 U4.17 U4.21 U4.22 U4.23 U4.24 U4.25

## Polygon pours and split planes (outlines as drawn)
GND on Top Layer "GND_L01_P038" (solid, pour order 38): -12.2,28.15 -11.475,27.425 -11.475,-24.3 50.95,-24.3 43.4,-16.75 43.4,23.3 -11.95,23.3 -12.15,23.1
VBUS_OUT on Top Layer "VBUS_OUT_L01_P035" (solid, pour order 35): 25,7.975 25.025,7.95 32.525,7.95 35.7,4.775 35.7,-1.525 36.532,-2.357 41.2,-2.357 41.2,0.55 39.475,2.275 38.2,2.275 37.525,2.95 37.525,5.775 32.175,11.125 24.975,11.125 24.975,8 24.95,7.975
VBUS_IN on Top Layer "VBUS_IN_L01_P034" (solid, pour order 34): 8.416,2.639 9.016,3.239 9.87,3.239 9.87,1.139 9.77,1.039 4.97,1.039 4.97,1.539 6.57,1.539 7.67,2.639
VBUS_IN on Top Layer "VBUS_IN_L01_P031" (solid, pour order 31): 12.9,8 10.25,5.35 10.25,-0.75 9,-2 7.5,-2 7,-1.5 5.25,-1.5 5.25,-1 8.25,-1 8.7,-0.55 8.7,6.45 13.35,11.1 21.1,11.1 21.1,8
GND on Bottom Layer "GND_L02_P037" (solid, pour order 37): -12.575,22.95 -11.45,21.825 -11.45,-25.525 46.35,-25.525 46.15,-25.325 46.15,23.35 -11.9,23.35 -12.4,22.85
VBUS_OUT on Bottom Layer "VBUS_OUT_L02_P036" (solid, pour order 36): 27.707,7.963 32.513,7.963 35.688,4.788 35.688,-1.512 36.519,-2.344 39.463,-2.344 39.463,2.288 38.187,2.288 37.513,2.962 37.513,5.788 32.163,11.138 27.694,11.138
VBUS_IN on Bottom Layer "VBUS_IN_L02_P033" (solid, pour order 33): 12.875,7.975 10.225,5.325 10.225,-0.775 8.975,-2.025 7.475,-2.025 6.975,-1.525 4.4,-1.525 4.4,-0.8 8.45,-0.8 8.675,-0.575 8.675,6.425 13.325,11.075 18.6,11.075 18.6,7.975
VBUS_IN on Bottom Layer "VBUS_IN_L02_P032" (solid, pour order 32): 8.746,2.6 9.346,3.2 10.2,3.2 10.2,1.1 9.9,0.8 4.3,0.8 4.3,1.7 7.1,1.7 8,2.6
no net on Bottom Layer "NONET_L02_P022" (solid, pour order 22): 10.862,3.812 11.05,3.625 10.8,3.625 10.775,3.6

## Silkscreen, mask and mechanical layers (free items; w line width, h text height)
Top Overlay:
  drawing of 4 lines, arcs and shapes, not listed
  text "BIG BRAIN" at 7.823,10.787 h1
  text "USB-C Powermeter" at 6.022,9.338 h0.7
  text "V1.0" at 6.022,8.222 h0.7
  text "Power" at 30.78,7.45 h0.5 r90
  text "Status" at 34.13,7.292 h0.5 r90
Bottom Overlay:
  text "SWD" at 18.345,14.064 h0.5
  text "SWCLK" at 21.054,14.064 h0.5
  text "GND" at 24.841,14.045 h0.5
  text "3.3V" at 26.975,14.045 h0.5
  text "GND" at 28.716,14.045 h0.5
  text "3.3V" at 23.125,14.02 h0.5
Mechanical 1:
  lines w0.254: -5.5,0 -5.5,4.5 cw(c-4,4.5) -4,6 0.875,6 ; -5.5,0.3 -5.5,-4.2 ccw(c-4,-4.2) -4,-5.7 0.875,-5.7 ; 0.884,-5.705 cw(c0.884,-6.955) 1.634,-5.955 2.634,-6.955 ; 0.884,6.005 ccw(c0.884,7.255) 1.634,6.255 2.634,7.255 ; 2.609,-6.93 6.702,-11.023 ; 2.609,7.23 9.915,14.535 ; 6.75,-11.075 ccw(c7.5,-10.075) 7.5,-11.325 ; 7.525,-11.326 32.6,-11.325 ; 9.975,14.575 cw(c10.725,13.575) 10.725,14.825 ; 10.708,14.826 31.725,14.826 ; 31.75,14.825 cw(c31.75,13.575) 32.75,14.325 ; 32.624,-11.325 ccw(c32.624,-10.075) 33.625,-10.825 ; 32.759,14.305 38.057,9.007 ; 33.637,-10.813 38.982,-5.457 ; 38.076,8.994 cw(c37.05,7.9) 38.55,7.9 ; 38.553,7.905 38.55,6.825 ccw(c40.05,6.825) 40.05,5.325 cw(c40.05,3.825) 41.55,3.825 41.55,-0.675 ; 38.989,-5.464 cw(c40.05,-6.525) 40.05,-5.025 ccw(c40.05,-3.525) 41.55,-3.525 41.55,0.975

## Text inside footprints (layer, text, board x,y; h text height)
J_IN: Top 3D Body "PCB Edge" at -5.576,1.717 h0.7 r270
P1: Top Overlay "6" at 29.85,13.675 h0.7; Top Overlay "1" at 16.35,13.7 h0.7
U4: Bottom Overlay "30" at 11.283,-7.6 h0.7; Bottom Overlay "1" at 34.517,-8.05 h0.7